# EAGLE board ball_presence_panel (EAGLE 9.6.2)
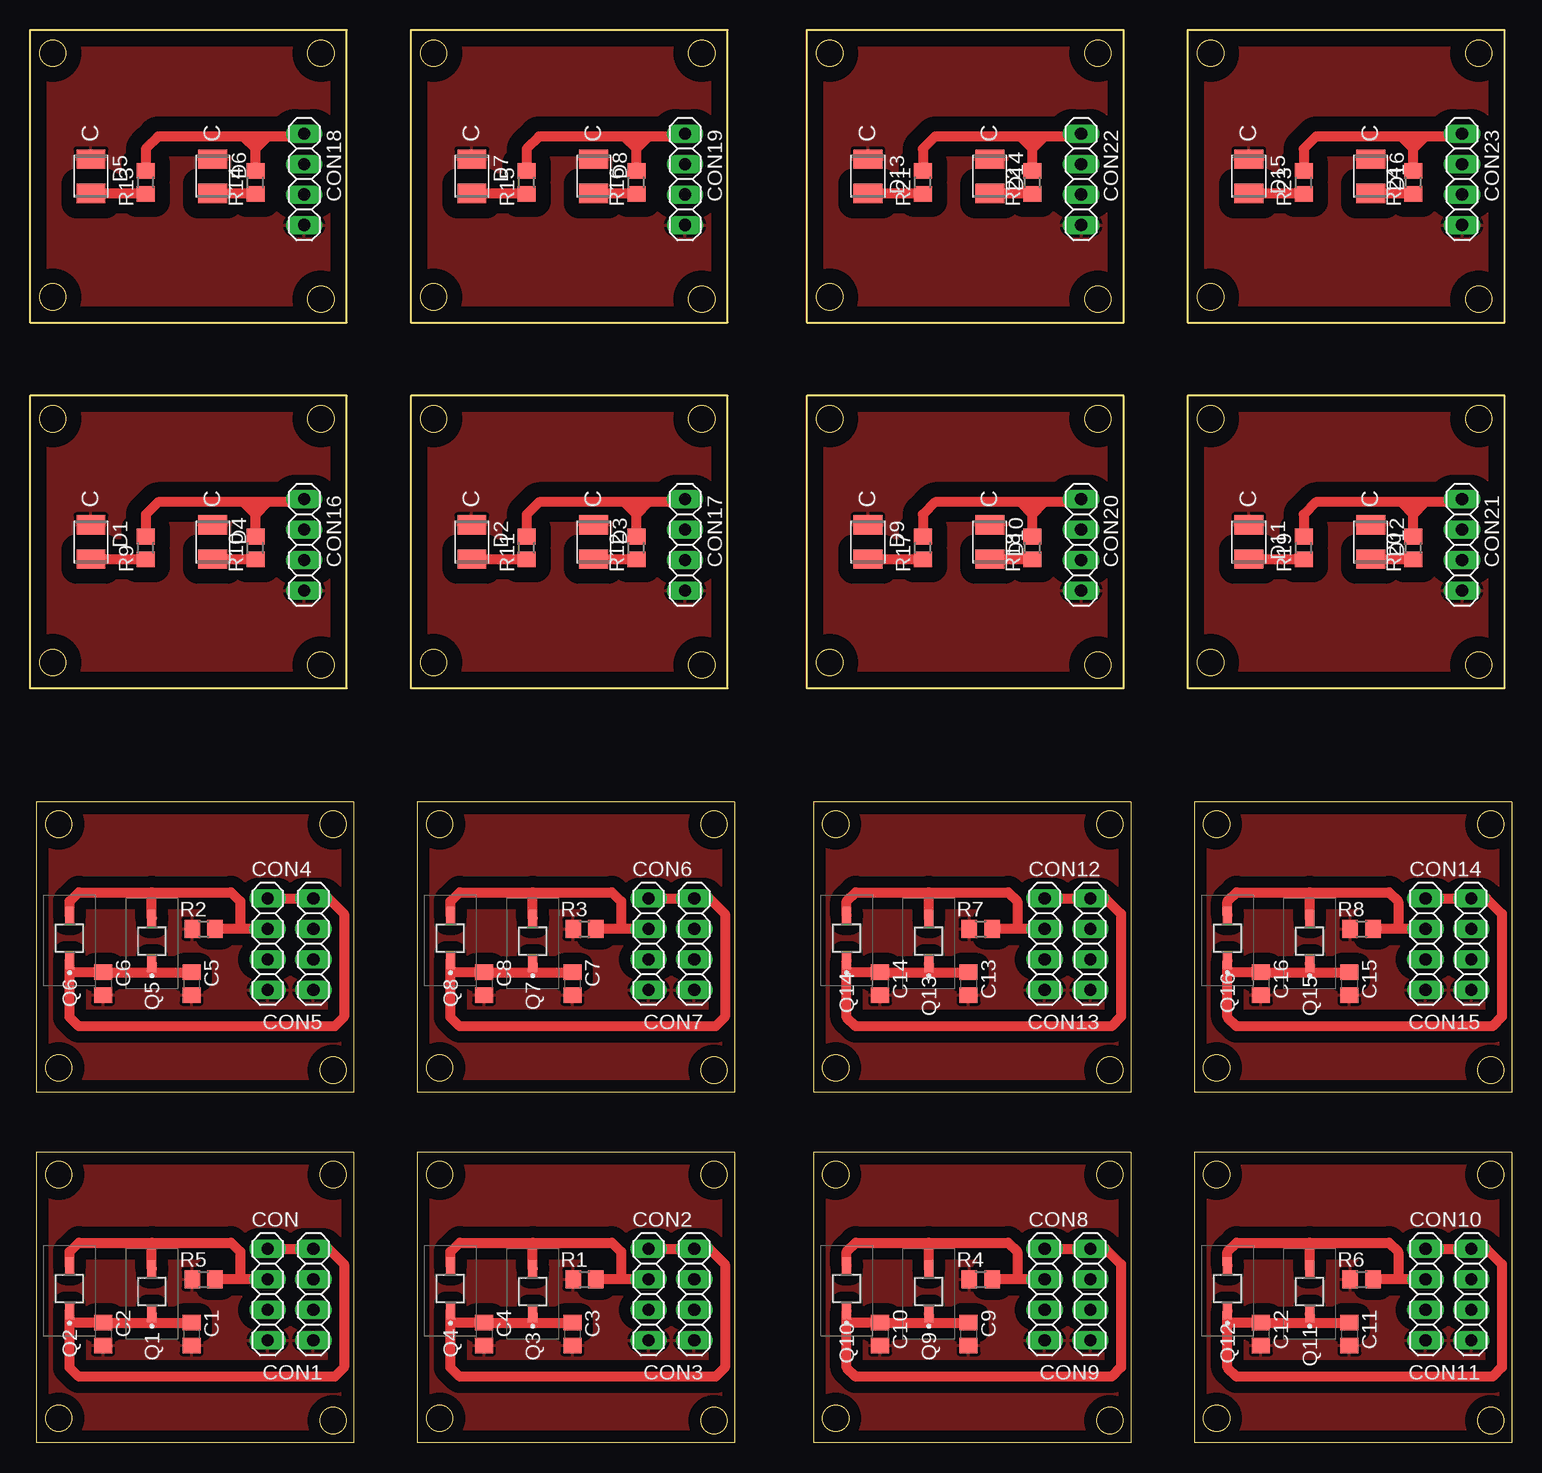
[diagram p0: board, top side]

Size 123.51 x 117.76 mm. Coordinates in mm from the lower left corner, seen from the top.
Outline: 0.54,24.19 0.54,0 26.99,0 26.99,24.19 0.54,24.19
Outline: 32.29,24.19 32.29,0 58.74,0 58.74,24.19 32.29,24.19
Outline: 0.54,53.4 0.54,29.21 26.99,29.21 26.99,53.4 0.54,53.4
Outline: 32.29,53.4 32.29,29.21 58.74,29.21 58.74,53.4 32.29,53.4
Outline: 65.31,24.19 65.31,0 91.76,0 91.76,24.19 65.31,24.19
Outline: 97.06,24.19 97.06,0 123.51,0 123.51,24.19 97.06,24.19
Outline: 65.31,53.4 65.31,29.21 91.76,29.21 91.76,53.4 65.31,53.4
Outline: 97.06,53.4 97.06,29.21 123.51,29.21 123.51,53.4 97.06,53.4
Outline: 0,62.89 0,87.28 26.42,87.28 26.42,62.89 0,62.89
Outline: 31.75,62.89 31.75,87.28 58.17,87.28 58.17,62.89 31.75,62.89
Outline: 0,93.37 0,117.76 26.42,117.76 26.42,93.37 0,93.37
Outline: 31.75,93.37 31.75,117.76 58.17,117.76 58.17,93.37 31.75,93.37
Outline: 64.77,62.89 64.77,87.28 91.19,87.28 91.19,62.89 64.77,62.89
Outline: 96.52,62.89 96.52,87.28 122.94,87.28 122.94,62.89 96.52,62.89
Outline: 64.77,93.37 64.77,117.76 91.19,117.76 91.19,93.37 64.77,93.37
Outline: 96.52,93.37 96.52,117.76 122.94,117.76 122.94,93.37 96.52,93.37
Outline: circle at 25.26,22.35 radius 1.1
Outline: circle at 25.26,1.84 radius 1.1
Outline: circle at 2.4,22.35 radius 1.1
Outline: circle at 2.4,2.03 radius 1.1
Outline: circle at 57.01,22.35 radius 1.1
Outline: circle at 57.01,1.84 radius 1.1
Outline: circle at 34.15,22.35 radius 1.1
Outline: circle at 34.15,2.03 radius 1.1
Outline: circle at 25.26,51.56 radius 1.1
Outline: circle at 25.26,31.05 radius 1.1
Outline: circle at 2.4,51.56 radius 1.1
Outline: circle at 2.4,31.24 radius 1.1
Outline: circle at 57.01,51.56 radius 1.1
Outline: circle at 57.01,31.05 radius 1.1
Outline: circle at 34.15,51.56 radius 1.1
Outline: circle at 34.15,31.24 radius 1.1
Outline: circle at 90.03,22.35 radius 1.1
Outline: circle at 90.03,1.84 radius 1.1
Outline: circle at 67.17,22.35 radius 1.1
Outline: circle at 67.17,2.03 radius 1.1
Copper layers (1*16): Top 0.035mm / dielectric 1.5mm / Bottom 0.035mm
Design rules "default": minimum track width 6mil, minimum drill 0.35mm, track to track 6mil, track to pad 6mil, pad to pad 6mil, via to via 6mil, smd to smd 6mil, copper to edge 40mil, drill to drill 6mil, minimum pad ring 10mil, minimum via ring 8mil, stop-mask expansion 4mil, vias tented up to drill 0mil, thermal gap 10mil

## Footprints (pad centres in the part's own frame; a part is rotated, then mirrored left to right if it is on the bottom)
C0805 = smd 1.3 x 1.5: 1 -0.95,0; 2 0.95,0
1X04 = drill 1.016 long: 1 -3.81,0; 2 -1.27,0; 3 1.27,0; 4 3.81,0
3528-2PIN = smd 1.6 x 2.4: 1 -1.425,0; 2 1.425,0
VEMT2520X01 = smd 1.35 x 0.75: 1 -1.9,0; 2 1.9,0
R0805 = smd 1.3 x 1.5: 1 -0.95,0; 2 0.95,0

## Placement (x,y rotation side)
C1  [C0805]  13.46,9.04 270 top
C2  [C0805]  6.1,9.04 270 top
C3  [C0805]  45.21,9.04 270 top
C4  [C0805]  37.85,9.04 270 top
C5  [C0805]  13.46,38.25 270 top
C6  [C0805]  6.1,38.25 270 top
C7  [C0805]  45.21,38.25 270 top
C8  [C0805]  37.85,38.25 270 top
C9  [C0805]  78.23,9.04 270 top
C10  [C0805]  70.87,9.04 270 top
C11  [C0805]  109.98,9.04 270 top
C12  [C0805]  102.62,9.04 270 top
C13  [C0805]  78.23,38.25 270 top
C14  [C0805]  70.87,38.25 270 top
C15  [C0805]  109.98,38.25 270 top
C16  [C0805]  102.62,38.25 270 top
CON  [1X04]  19.81,12.35 270 top
CON1  [1X04]  23.62,12.35 270 top
CON2  [1X04]  51.56,12.35 270 top
CON3  [1X04]  55.37,12.35 270 top
CON4  [1X04]  19.81,41.56 270 top
CON5  [1X04]  23.62,41.56 270 top
CON6  [1X04]  51.56,41.56 270 top
CON7  [1X04]  55.37,41.56 270 top
CON8  [1X04]  84.58,12.35 270 top
CON9  [1X04]  88.39,12.35 270 top
CON10  [1X04]  116.33,12.35 270 top
CON11  [1X04]  120.14,12.35 270 top
CON12  [1X04]  84.58,41.56 270 top
CON13  [1X04]  88.39,41.56 270 top
CON14  [1X04]  116.33,41.56 270 top
CON15  [1X04]  120.14,41.56 270 top
CON16  [1X04]  22.86,74.83 270 top
CON17  [1X04]  54.61,74.83 270 top
CON18  [1X04]  22.86,105.31 270 top
CON19  [1X04]  54.61,105.31 270 top
CON20  [1X04]  87.63,74.83 270 top
CON21  [1X04]  119.38,74.83 270 top
CON22  [1X04]  87.63,105.31 270 top
CON23  [1X04]  119.38,105.31 270 top
D1  [3528-2PIN]  5.08,75.08 270 top
D2  [3528-2PIN]  36.83,75.08 270 top
D3  [3528-2PIN]  46.99,75.08 270 top
D4  [3528-2PIN]  15.24,75.08 270 top
D5  [3528-2PIN]  5.08,105.56 270 top
D6  [3528-2PIN]  15.24,105.56 270 top
D7  [3528-2PIN]  36.83,105.56 270 top
D8  [3528-2PIN]  46.99,105.56 270 top
D9  [3528-2PIN]  69.85,75.08 270 top
D10  [3528-2PIN]  80.01,75.08 270 top
D11  [3528-2PIN]  101.6,75.08 270 top
D12  [3528-2PIN]  111.76,75.08 270 top
D13  [3528-2PIN]  69.85,105.56 270 top
D14  [3528-2PIN]  80.01,105.56 270 top
D15  [3528-2PIN]  101.6,105.56 270 top
D16  [3528-2PIN]  111.76,105.56 270 top
Q1  VEMT2520X01  [VEMT2520X01]  10.16,12.6 90 top
Q2  VEMT2520X01  [VEMT2520X01]  3.3,12.85 90 top
Q3  VEMT2520X01  [VEMT2520X01]  41.91,12.6 90 top
Q4  VEMT2520X01  [VEMT2520X01]  35.05,12.85 90 top
Q5  VEMT2520X01  [VEMT2520X01]  10.16,41.81 90 top
Q6  VEMT2520X01  [VEMT2520X01]  3.3,42.06 90 top
Q7  VEMT2520X01  [VEMT2520X01]  41.91,41.81 90 top
Q8  VEMT2520X01  [VEMT2520X01]  35.05,42.06 90 top
Q9  VEMT2520X01  [VEMT2520X01]  74.93,12.6 90 top
Q10  VEMT2520X01  [VEMT2520X01]  68.07,12.85 90 top
Q11  VEMT2520X01  [VEMT2520X01]  106.68,12.6 90 top
Q12  VEMT2520X01  [VEMT2520X01]  99.82,12.85 90 top
Q13  VEMT2520X01  [VEMT2520X01]  74.93,41.81 90 top
Q14  VEMT2520X01  [VEMT2520X01]  68.07,42.06 90 top
Q15  VEMT2520X01  [VEMT2520X01]  106.68,41.81 90 top
Q16  VEMT2520X01  [VEMT2520X01]  99.82,42.06 90 top
R1  [R0805]  46.23,13.62 0 top
R2  [R0805]  14.48,42.83 0 top
R3  [R0805]  46.23,42.83 0 top
R4  [R0805]  79.25,13.62 0 top
R5  [R0805]  14.48,13.62 0 top
R6  [R0805]  111,13.62 0 top
R7  [R0805]  79.25,42.83 0 top
R8  [R0805]  111,42.83 0 top
R9  [R0805]  9.65,74.58 90 top
R10  [R0805]  18.8,74.58 90 top
R11  [R0805]  41.4,74.58 90 top
R12  [R0805]  50.55,74.58 90 top
R13  [R0805]  9.65,105.06 90 top
R14  [R0805]  18.8,105.06 90 top
R15  [R0805]  41.4,105.06 90 top
R16  [R0805]  50.55,105.06 90 top
R17  [R0805]  74.42,74.58 90 top
R18  [R0805]  83.57,74.58 90 top
R19  [R0805]  106.17,74.58 90 top
R20  [R0805]  115.32,74.58 90 top
R21  [R0805]  74.42,105.06 90 top
R22  [R0805]  83.57,105.06 90 top
R23  [R0805]  106.17,105.06 90 top
R24  [R0805]  115.32,105.06 90 top

## Library data of the parts
C1-C16 = rcl; SPICEPREFIX: C
CON CON1-CON23 = pinhead
D1-D16 = Wurth_Elektronik_Optoelectronics_rev15b; COMPANY-URL: http://www.we-online.de; CREATED-BY: Christin Otto; CREATED-DATE: APR 2013; DATASHEET-URL: http://katalog.we-online.de/en/led/WL-SMTW?m=t&sq=smtw&sp=&sp=http%3A%2F%2Fwww.we-online.de%2Fweb%2Fen%2Felectronic_components%2Fsearchpage_PBS.php%3Fsearch%3Dsmtw; MANUFACTURER: Würth Elektronik eiSos GmbH
Q1-Q16 = Fototransistor; DESCRIPTION: Vishay VEMT2520X01 +/-15 IR + Visible Light Phototransistor, Surface Mount 2-Pin Reverse Gullwing Package; HEIGHT: 2mm; MANUFACTURER_NAME: Vishay; MANUFACTURER_PART_NUMBER: VEMT2520X01; MOUSER_PART_NUMBER: 782-VEMT2520X01; MOUSER_PRICE-STOCK: https://www.mouser.com/Search/Refine.aspx?Keyword=782-VEMT2520X01; RS_PART_NUMBER: 7689417P; RS_PRICE-STOCK: http://uk.rs-online.com/web/p/products/7689417P
R1-R24 = rcl; SPICEPREFIX: R

## Nets
GND: C1.2 C2.2 CON1.4 CON.4 R5.1
GND1: C3.2 C4.2 CON2.4 CON3.4 R1.1
GND2: C5.2 C6.2 CON4.4 CON5.4 R2.1
GND3: C7.2 C8.2 CON6.4 CON7.4 R3.1
GND4: C9.2 C10.2 CON8.4 CON9.4 R4.1
GND5: C11.2 C12.2 CON10.4 CON11.4 R6.1
GND6: C13.2 C14.2 CON12.4 CON13.4 R7.1
GND7: C15.2 C16.2 CON14.4 CON15.4 R8.1
GND8: CON16.4 D1.1 D4.1
GND9: CON17.4 D2.1 D3.1
GND10: CON18.4 D5.1 D6.1
GND11: CON19.4 D7.1 D8.1
GND12: CON20.4 D9.1 D10.1
GND13: CON21.4 D11.1 D12.1
GND14: CON22.4 D13.1 D14.1
GND15: CON23.4 D15.1 D16.1
N$1: D1.2 R9.1
N$2: D2.2 R11.1
N$3: D3.2 R12.1
N$4: D4.2 R10.1
N$5: D5.2 R13.1
N$6: D6.2 R14.1
N$7: D7.2 R15.1
N$8: D8.2 R16.1
N$9: D9.2 R17.1
N$10: D10.2 R18.1
N$11: D11.2 R19.1
N$12: D12.2 R20.1
N$13: D13.2 R21.1
N$14: D14.2 R22.1
N$15: D15.2 R23.1
N$16: D16.2 R24.1
SIG1: CON.2 Q1.2 Q2.2 R5.2
SIG2: CON2.2 Q3.2 Q4.2 R1.2
SIG3: CON4.2 Q5.2 Q6.2 R2.2
SIG4: CON6.2 Q7.2 Q8.2 R3.2
SIG5: CON8.2 Q9.2 Q10.2 R4.2
SIG6: CON10.2 Q11.2 Q12.2 R6.2
SIG7: CON12.2 Q13.2 Q14.2 R7.2
SIG8: CON14.2 Q15.2 Q16.2 R8.2
SIG9: CON16.2
SIG10: CON17.2
SIG11: CON18.2
SIG12: CON19.2
SIG13: CON20.2
SIG14: CON21.2
SIG15: CON22.2
SIG16: CON23.2
V+: C1.1 C2.1 CON1.1 CON.1 Q1.1 Q2.1
V+1: C3.1 C4.1 CON2.1 CON3.1 Q3.1 Q4.1
V+2: C5.1 C6.1 CON4.1 CON5.1 Q5.1 Q6.1
V+3: C7.1 C8.1 CON6.1 CON7.1 Q7.1 Q8.1
V+4: C9.1 C10.1 CON8.1 CON9.1 Q9.1 Q10.1
V+5: C11.1 C12.1 CON10.1 CON11.1 Q11.1 Q12.1
V+6: C13.1 C14.1 CON12.1 CON13.1 Q13.1 Q14.1
V+7: C15.1 C16.1 CON14.1 CON15.1 Q15.1 Q16.1
V+8: CON16.1 R9.2 R10.2
V+9: CON17.1 R11.2 R12.2
V+10: CON18.1 R13.2 R14.2
V+11: CON19.1 R15.2 R16.2
V+12: CON20.1 R17.2 R18.2
V+13: CON21.1 R19.2 R20.2
V+14: CON22.1 R21.2 R22.2
V+15: CON23.1 R23.2 R24.2

## Tracks (layer width: path | path; a pad name or v marks a point on that pad's centre or on a via)
GND
  pour Top (isolate 0.965): 0,24.79 0,-0.61 27.43,-0.61 27.43,24.79
GND1
  pour Top (isolate 0.965): 31.75,24.79 31.75,-0.61 59.18,-0.61 59.18,24.79
GND2
  pour Top (isolate 0.965): 0,54 0,28.6 27.43,28.6 27.43,54
GND3
  pour Top (isolate 0.965): 31.75,54 31.75,28.6 59.18,28.6 59.18,54
GND4
  pour Top (isolate 0.965): 64.77,24.79 64.77,-0.61 92.2,-0.61 92.2,24.79
GND5
  pour Top (isolate 0.965): 96.52,24.79 96.52,-0.61 123.95,-0.61 123.95,24.79
GND6
  pour Top (isolate 0.965): 64.77,54 64.77,28.6 92.2,28.6 92.2,54
GND7
  pour Top (isolate 0.965): 96.52,54 96.52,28.6 123.95,28.6 123.95,54
GND8
  pour Top (isolate 1.27): -0.25,87.53 -0.25,62.13 26.67,62.13 26.67,87.53
GND9
  pour Top (isolate 1.27): 31.5,87.53 31.5,62.13 58.42,62.13 58.42,87.53
GND10
  pour Top (isolate 1.27): -0.25,118.01 -0.25,92.61 26.67,92.61 26.67,118.01
GND11
  pour Top (isolate 1.27): 31.5,118.01 31.5,92.61 58.42,92.61 58.42,118.01
GND12
  pour Top (isolate 1.27): 64.52,87.53 64.52,62.13 91.44,62.13 91.44,87.53
GND13
  pour Top (isolate 1.27): 96.27,87.53 96.27,62.13 123.19,62.13 123.19,87.53
GND14
  pour Top (isolate 1.27): 64.52,118.01 64.52,92.61 91.44,92.61 91.44,118.01
GND15
  pour Top (isolate 1.27): 96.27,118.01 96.27,92.61 123.19,92.61 123.19,118.01
N$1
  Top 0.813: 9.59,73.56 R9.1 9.62,73.66 D1.2
N$2
  Top 0.813: 41.34,73.56 R11.1 41.37,73.66 D2.2
N$3
  Top 0.813: D3.2 50.51,73.66 R12.1
N$4
  Top 0.813: D4.2 18.76,73.66 R10.1
N$5
  Top 0.813: 9.59,104.04 R13.1 9.62,104.14 D5.2
N$6
  Top 0.813: D6.2 18.76,104.14 R14.1
N$7
  Top 0.813: 41.34,104.04 R15.1 41.37,104.14 D7.2
N$8
  Top 0.813: D8.2 50.51,104.14 R16.1
N$9
  Top 0.813: 74.36,73.56 R17.1 74.39,73.66 D9.2
N$10
  Top 0.813: D10.2 83.53,73.66 R18.1
N$11
  Top 0.813: 106.11,73.56 R19.1 106.14,73.66 D11.2
N$12
  Top 0.813: D12.2 115.28,73.66 R20.1
N$13
  Top 0.813: 74.36,104.04 R21.1 74.39,104.14 D13.2
N$14
  Top 0.813: D14.2 83.53,104.14 R22.1
N$15
  Top 0.813: 106.11,104.04 R23.1 106.14,104.14 D15.2
N$16
  Top 0.813: D16.2 115.28,104.14 R24.1
SIG1
  Top 0.813: Q2.2 3.3,15.9 4.06,16.66 10.16,16.66 | 10.16,16.66 16.76,16.66 17.53,15.9 17.53,13.62 | CON.2 17.53,13.62 | 17.53,13.62 R5.2 | Q1.2 10.16,16.66
SIG2
  Top 0.813: Q4.2 35.05,15.9 35.81,16.66 41.91,16.66 | 41.91,16.66 48.51,16.66 49.28,15.9 49.28,13.62 | CON2.2 49.28,13.62 | 49.28,13.62 R1.2 | Q3.2 41.91,16.66
SIG3
  Top 0.813: Q6.2 3.3,45.11 4.06,45.87 10.16,45.87 | 10.16,45.87 16.76,45.87 17.53,45.11 17.53,42.83 | CON4.2 17.53,42.83 | 17.53,42.83 R2.2 | Q5.2 10.16,45.87
SIG4
  Top 0.813: Q8.2 35.05,45.11 35.81,45.87 41.91,45.87 | 41.91,45.87 48.51,45.87 49.28,45.11 49.28,42.83 | CON6.2 49.28,42.83 | 49.28,42.83 R3.2 | Q7.2 41.91,45.87
SIG5
  Top 0.813: Q10.2 68.07,15.9 68.83,16.66 74.93,16.66 | 74.93,16.66 81.53,16.66 82.3,15.9 82.3,13.62 | CON8.2 82.3,13.62 | 82.3,13.62 R4.2 | Q9.2 74.93,16.66
SIG6
  Top 0.813: Q12.2 99.82,15.9 100.58,16.66 106.68,16.66 | 106.68,16.66 113.28,16.66 114.05,15.9 114.05,13.62 | CON10.2 114.05,13.62 | 114.05,13.62 R6.2 | Q11.2 106.68,16.66
SIG7
  Top 0.813: Q14.2 68.07,45.11 68.83,45.87 74.93,45.87 | 74.93,45.87 81.53,45.87 82.3,45.11 82.3,42.83 | CON12.2 82.3,42.83 | 82.3,42.83 R7.2 | Q13.2 74.93,45.87
SIG8
  Top 0.813: Q16.2 99.82,45.11 100.58,45.87 106.68,45.87 | 106.68,45.87 113.28,45.87 114.05,45.11 114.05,42.83 | CON14.2 114.05,42.83 | 114.05,42.83 R8.2 | Q15.2 106.68,45.87
V+
  Top 0.813: CON.1 CON1.1 24.89,16.16 26.19,14.86 26.19,6.27 25.4,5.49 4.06,5.49 3.3,6.25 3.3,10.06 | 13.4,10.06 C1.1 10.16,9.99 | 6.16,10.06 C2.1 | 3.3,10.06 Q2.1 | C2.1 3.37,9.99 3.3,10.06 | C2.1 10.16,9.99 | Q1.1 10.16,9.99
V+1
  Top 0.813: CON2.1 CON3.1 56.64,16.16 57.94,14.86 57.94,6.27 57.15,5.49 35.81,5.49 35.05,6.25 35.05,10.06 | 45.15,10.06 C3.1 41.91,9.99 | 37.91,10.06 C4.1 | 35.05,10.06 Q4.1 | C4.1 35.12,9.99 35.05,10.06 | C4.1 41.91,9.99 | Q3.1 41.91,9.99
V+2
  Top 0.813: CON4.1 CON5.1 24.89,45.37 26.19,44.07 26.19,35.48 25.4,34.7 4.06,34.7 3.3,35.46 3.3,39.27 | 13.4,39.27 C5.1 10.16,39.2 | 6.16,39.27 C6.1 | 3.3,39.27 Q6.1 | C6.1 3.37,39.2 3.3,39.27 | C6.1 10.16,39.2 | Q5.1 10.16,39.2
V+3
  Top 0.813: CON6.1 CON7.1 56.64,45.37 57.94,44.07 57.94,35.48 57.15,34.7 35.81,34.7 35.05,35.46 35.05,39.27 | 45.15,39.27 C7.1 41.91,39.2 | 37.91,39.27 C8.1 | 35.05,39.27 Q8.1 | C8.1 35.12,39.2 35.05,39.27 | C8.1 41.91,39.2 | Q7.1 41.91,39.2
V+4
  Top 0.813: CON8.1 CON9.1 89.66,16.16 90.96,14.86 90.96,6.27 90.17,5.49 68.83,5.49 68.07,6.25 68.07,10.06 | 78.17,10.06 C9.1 74.93,9.99 | 70.93,10.06 C10.1 | 68.07,10.06 Q10.1 | C10.1 68.14,9.99 68.07,10.06 | C10.1 74.93,9.99 | Q9.1 74.93,9.99
V+5
  Top 0.813: CON10.1 CON11.1 121.41,16.16 122.71,14.86 122.71,6.27 121.92,5.49 100.58,5.49 99.82,6.25 99.82,10.06 | 109.92,10.06 C11.1 106.68,9.99 | 102.68,10.06 C12.1 | 99.82,10.06 Q12.1 | C12.1 99.89,9.99 99.82,10.06 | C12.1 106.68,9.99 | Q11.1 106.68,9.99
V+6
  Top 0.813: CON12.1 CON13.1 89.66,45.37 90.96,44.07 90.96,35.48 90.17,34.7 68.83,34.7 68.07,35.46 68.07,39.27 | 78.17,39.27 C13.1 74.93,39.2 | 70.93,39.27 C14.1 | 68.07,39.27 Q14.1 | C14.1 68.14,39.2 68.07,39.27 | C14.1 74.93,39.2 | Q13.1 74.93,39.2
V+7
  Top 0.813: CON14.1 CON15.1 121.41,45.37 122.71,44.07 122.71,35.48 121.92,34.7 100.58,34.7 99.82,35.46 99.82,39.27 | 109.92,39.27 C15.1 106.68,39.2 | 102.68,39.27 C16.1 | 99.82,39.27 Q16.1 | C16.1 99.89,39.2 99.82,39.27 | C16.1 106.68,39.2 | Q15.1 106.68,39.2
V+8
  Top 0.813: 19.05,75.53 R10.2 18.8,77.37 | CON16.1 22.61,78.39 19.81,78.39 | R9.2 9.65,77.37 10.67,78.39 17.78,78.39 | 19.81,78.39 18.8,78.39 | 18.8,78.39 17.78,78.39 | 18.8,77.37 18.8,77.88 18.8,78.39 | 18.8,77.37 19.81,78.39 | 17.78,78.39 18.8,77.37
V+9
  Top 0.813: 50.8,75.53 R12.2 50.55,77.37 | CON17.1 54.36,78.39 51.56,78.39 | R11.2 41.4,77.37 42.42,78.39 49.53,78.39 | 51.56,78.39 50.55,78.39 | 50.55,78.39 49.53,78.39 | 50.55,77.37 50.55,77.88 50.55,78.39 | 50.55,77.37 51.56,78.39 | 49.53,78.39 50.55,77.37
V+10
  Top 0.813: 19.05,106.01 R14.2 18.8,107.85 | CON18.1 22.61,108.87 19.81,108.87 | R13.2 9.65,107.85 10.67,108.87 17.78,108.87 | 19.81,108.87 18.8,108.87 | 18.8,108.87 17.78,108.87 | 18.8,107.85 18.8,108.36 18.8,108.87 | 18.8,107.85 19.81,108.87 | 17.78,108.87 18.8,107.85
V+11
  Top 0.813: 50.8,106.01 R16.2 50.55,107.85 | CON19.1 54.36,108.87 51.56,108.87 | R15.2 41.4,107.85 42.42,108.87 49.53,108.87 | 51.56,108.87 50.55,108.87 | 50.55,108.87 49.53,108.87 | 50.55,107.85 50.55,108.36 50.55,108.87 | 50.55,107.85 51.56,108.87 | 49.53,108.87 50.55,107.85
V+12
  Top 0.813: 83.82,75.53 R18.2 83.57,77.37 | CON20.1 87.38,78.39 84.58,78.39 | R17.2 74.42,77.37 75.44,78.39 82.55,78.39 | 84.58,78.39 83.57,78.39 | 83.57,78.39 82.55,78.39 | 83.57,77.37 83.57,77.88 83.57,78.39 | 83.57,77.37 84.58,78.39 | 82.55,78.39 83.57,77.37
V+13
  Top 0.813: 115.57,75.53 R20.2 115.32,77.37 | CON21.1 119.13,78.39 116.33,78.39 | R19.2 106.17,77.37 107.19,78.39 114.3,78.39 | 116.33,78.39 115.32,78.39 | 115.32,78.39 114.3,78.39 | 115.32,77.37 115.32,77.88 115.32,78.39 | 115.32,77.37 116.33,78.39 | 114.3,78.39 115.32,77.37
V+14
  Top 0.813: 83.82,106.01 R22.2 83.57,107.85 | CON22.1 87.38,108.87 84.58,108.87 | R21.2 74.42,107.85 75.44,108.87 82.55,108.87 | 84.58,108.87 83.57,108.87 | 83.57,108.87 82.55,108.87 | 83.57,107.85 83.57,108.36 83.57,108.87 | 83.57,107.85 84.58,108.87 | 82.55,108.87 83.57,107.85
V+15
  Top 0.813: 115.57,106.01 R24.2 115.32,107.85 | CON23.1 119.13,108.87 116.33,108.87 | R23.2 106.17,107.85 107.19,108.87 114.3,108.87 | 116.33,108.87 115.32,108.87 | 115.32,108.87 114.3,108.87 | 115.32,107.85 115.32,108.36 115.32,108.87 | 115.32,107.85 116.33,108.87 | 114.3,108.87 115.32,107.85